# Altium PCB PedalBox.PcbDoc (part 2 of 2)
Units mm, origin at the board's own origin, x right, y up, seen from the top; angles counter-clockwise.
Board outline 89.6 x 44.45 mm, 2 copper layers (Top Layer, Bottom Layer); 149 components, 99 nets, 491 pads, 141 vias.
Unrouted connection lines stored in the file: 1.
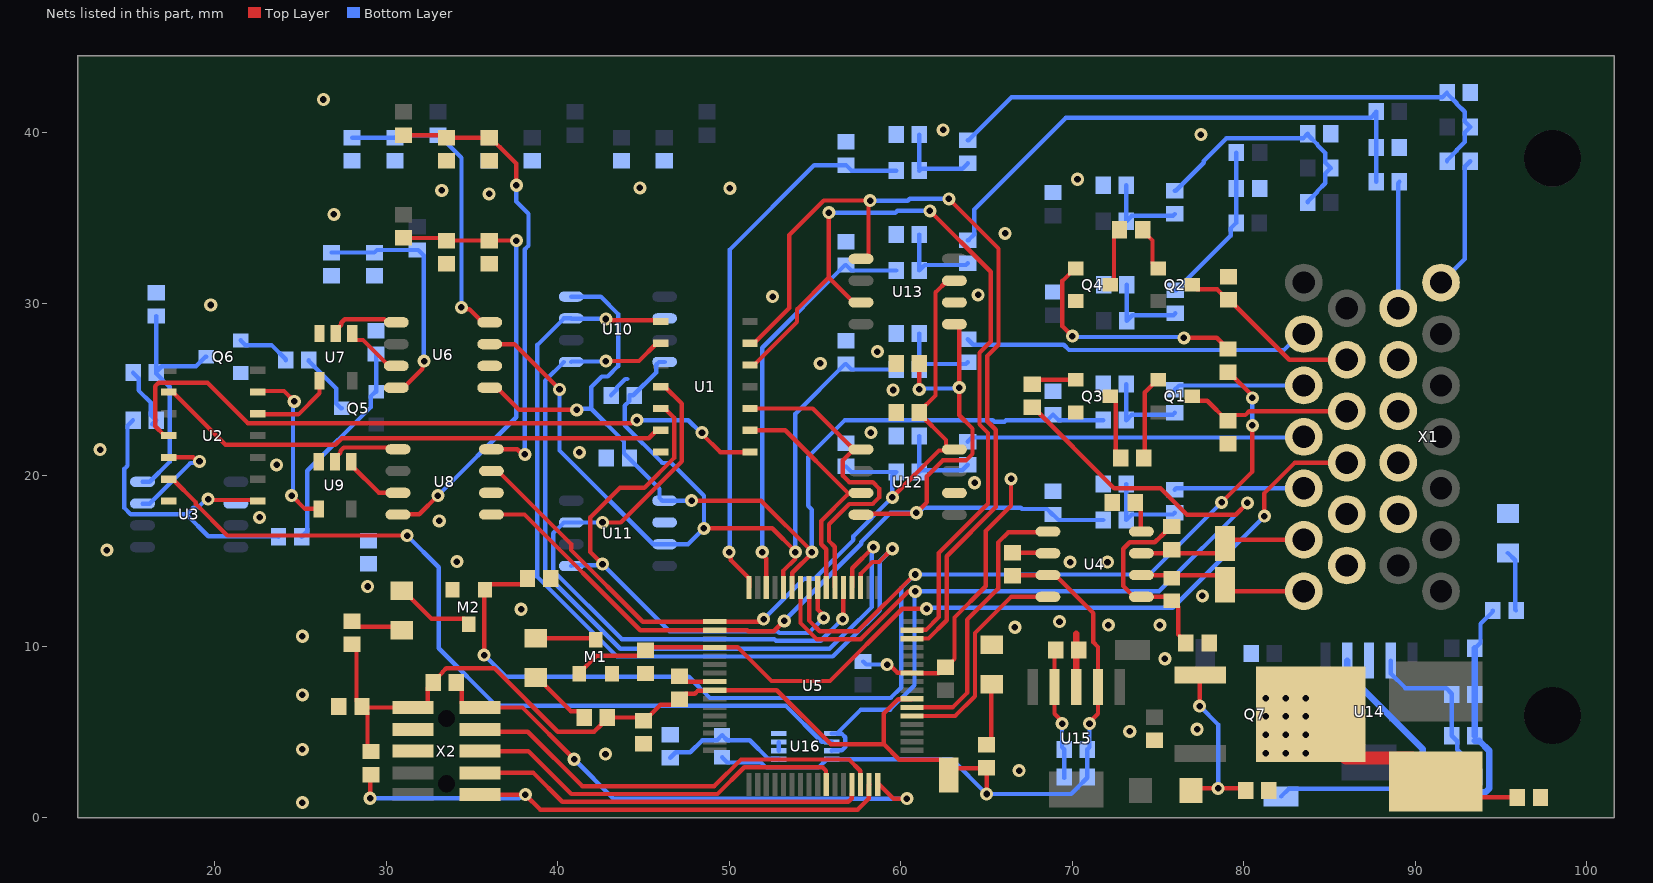
[diagram p2: the nets of this part, all layers, seen from the top]

## Via types
v1: diameter 0.762, hole 0.381, Top Layer to Bottom Layer, 141 vias

## Nets (pads, with @x,y where several pads share a name; then routed paths per layer and width w, separated by ;. In a path a pad name is that pad's centre, name@x,y a point inside that pad or via, vN(x,y) a via of type N, cw(c..) or ccw(c..) an arc to the next point about the centre after c; other vN are vias at no path point) (continued)
AGND: C1.1 C7.1 C8.1 C9.1 C10.1 C11.1 C12.1 C13.1 C14.1 C15.1 C16.1 C17.1 C18.1 C19.1 C20.1 C21.1 C22.1 C23.1 C24.1 C26.1 C27.1 C28.1 C29.1 C30.1 C31.1 C33.1 D4.2 L1.2 Q6.2 R11.1 R40.1 R41.1 R42.1 R43.1 R47.2 R48.2 R49.2 R53.2 R54.2 R55.2 R60.1 R61.1 R66.1 R67.1 R69.1 U1.7 U2.7 U3.2 U5.10 U6.2 U7.3 U8.2 U9.3 U10.2 U11.2 U12.2 U13.2 U14.3 | length 19.2
  Top Layer w0.254: v1(59.2,8.95) 59.317,8.95 59.797,8.47 60.63,8.47 U5.10@60.65,8.45 62.2,8.45 62.55,8.8 62.65,8.8 63.129,9.279 63.129,11.69 64.953,13.515 64.953,16.735 66.425,18.207 v1(66.425,19.772)
  Bottom Layer w0.254: R41.1@43.1,24.647 43.423,24.97 43.423,25.093 43.93,25.6 44.037,25.6 ; C8.1@57.8,9.125 57.975,8.95 v1(59.2,8.95)
  other v1: 13.7,15.625 33.08,17.325 22.6,17.525 64.3,19.55 23.6,20.596 41.25,21.325 13.3,21.478 58.25,22.476 59.55,24.958 55.298,26.507 58.625,27.2 19.755,29.916 52.525,30.405 64.5,30.5 66.075,34.091 26.932,35.2 35.99,36.4 33.225,36.6 44.775,36.74 50.025,36.725 70.3,37.25 77.5,39.85 62.465,40.129 26.325,41.9
BK1_Filtered: C20.2 R32.2 U5.30 | length 24
  Top Layer w0.254: v1(51.917,15.5) 51.917,15.363 52.15,15.13 U5.30@52.15,13.45
  Bottom Layer w0.254: v1(51.917,15.5) 51.917,27.417 56.75,32.25 C20.2@56.8,32.25 57.123,31.927 59.723,31.927 R32.2@59.725,31.925
BK1_Harness: R64.1 X1.19 | length 7.4
  Bottom Layer w0.254: X1.19@89,29.725 89,37.025 R64.1@89.075,37.1
BK2_Filtered: C18.2 R30.2 U5.32 | length 32.1
  Top Layer w0.254: v1(49.987,15.5) 50.084,15.403 50.084,15.041 51.15,13.975 U5.32@51.15,13.45
  Bottom Layer w0.254: v1(49.987,15.5) 50.028,15.541 50.028,33.153 54.95,38.075 C18.2@56.8,38.075 57.123,37.752 59.723,37.752 R30.2@59.725,37.75
BK2_Harness: R65.1 X1.26 | length 7.8
  Bottom Layer w0.254: X1.26@91.5,31.225 92.877,32.602 92.877,37.977 R65.1@93.2,38.3
BPC_1_0.5: U1.4 U5.21 U11.7 | length 37.4
  Top Layer w0.254: v1(42.6,17.235) 43.665,17.235 47.232,20.802 47.232,24.151 46.234,25.148 U1.4@46,25.148 ; v1(56.6,11.6) 56.63,11.63 56.63,13.43 U5.21@56.65,13.45
  Bottom Layer w0.254: v1(42.6,17.235) 40.35,17.235 39.72,16.605 39.72,14.434 43.722,10.432 52.616,10.432 52.716,10.332 55.332,10.332 v1(56.6,11.6)
BPC_1_4.5: U1.1 U5.19 U10.7 | length 51.6
  Top Layer w0.254: v1(42.8,29.1) 42.871,29.029 45.929,29.029 U1.1@46,28.958 ; U5.19@57.65,13.45 57.67,13.47 57.67,14.262 58.34,14.932 58.732,14.932 v1(59.5,15.7)
  Bottom Layer w0.254: v1(42.8,29.1) 42.783,29.117 40.793,29.117 U10.7@40.775,29.135 40.35,29.135 38.805,27.59 38.805,14.055 43.443,9.417 52.336,9.417 ; 52.337,9.417 56.029,9.417 57.043,10.432 57.084,10.432 58.767,12.114 58.767,14.967 v1(59.5,15.7)
BPC_2_0.5: U1.5 U5.24 U11.5 | length 31.4
  Top Layer w0.254: v1(42.6,14.8) 41.889,15.511 41.889,17.53 43.62,19.26 45.044,19.26 46.775,20.991 46.775,23.338 46.234,23.878 U1.5@46,23.878 ; U5.24@55.15,13.45 55.15,12.157 55.5,11.807 v1(55.5,11.67)
  Bottom Layer w0.254: U11.5@40.775,14.695 40.828,14.748 42.548,14.748 v1(42.6,14.8) ; v1@42.548,14.695 42.705,14.695 46.511,10.889 52.805,10.889 52.905,10.789 54.619,10.789 v1(55.5,11.67)
BPC_2_4.5: U1.2 U5.20 U10.5 | length 46.7
  Top Layer w0.254: v1(42.8,26.647) 44.725,26.647 45.765,27.688 U1.2@46,27.688 ; U5.20@57.15,13.45 57.17,13.47 57.17,14.57 v1(58.4,15.8)
  Bottom Layer w0.254: U10.5@40.35,26.595 39.263,25.508 39.263,14.245 43.633,9.874 52.147,9.874 52.526,9.875 ; U10.5@40.775,26.595 40.801,26.621 42.774,26.621 v1(42.8,26.647) ; 52.527,9.874 55.839,9.874 56.854,10.889 56.895,10.889 58.309,12.304 v1@58.309,15.819
BPC_AND_OUT: U1.6 U2.2 | length 30.3
  Top Layer w0.254: U2.2@17.3,24.84 17.535,24.84 20.615,21.76 27.021,21.76 27.404,22.142 45.3,22.142 45.765,22.608 U1.6@46,22.608
BPF_Filtered: C12.2 R24.2 R40.2 U5.27 U6.1 U10.8 U11.1 | length 59.7
  Top Layer w0.254: U6.1@36.025,25.095 36.45,25.095 37.745,23.8 v1(41.1,23.8) ; v1(47.795,18.505) 51.849,18.505 54.813,15.541 54.813,15.441 53.67,14.298 53.67,13.47 U5.27@53.65,13.45
  Bottom Layer w0.254: U10.8@40.775,30.405 42.501,30.405 43.511,29.395 43.511,26.353 42.903,25.745 42.553,25.745 41.945,25.137 41.945,23.863 ; v1(41.1,23.8) 41.163,23.863 41.945,23.863 ; v1(47.795,18.505) U11.1@46.225,18.505 46.087,18.505 45.927,18.665 45.927,19.198 43.852,21.273 43.852,21.956 41.945,23.863 ; v1(54.813,15.5) 54.813,17.981 54.589,18.205 54.589,21.056 56.735,23.202 65.367,23.202 65.455,23.114 66.045,23.114 66.133,23.202 68.552,23.202 C12.2@68.875,23.525 69.198,23.202 71.798,23.202 R24.2@71.8,23.2
BPF_Harness: R23.1 X1.5 | length 7.6
  Bottom Layer w0.254: R23.1@75.975,24.975 76.225,25.225 X1.5@83.5,25.225
BPR_Filtered: C14.2 R26.2 R41.2 U5.28 U6.3 U10.4 U11.3 | length 56.6
  Top Layer w0.254: U6.3@36.025,27.635 37.458,27.635 v1(40.093,25) ; v1(48.517,16.892) 52.497,16.892 53.848,15.541 v1(53.848,15.5) 53.848,15.123 53.15,14.425 U5.28@53.15,13.45
  Bottom Layer w0.254: v1(40.093,25) 40.093,21.432 45.56,15.965 U11.3@46.225,15.965 47.59,15.965 v1(48.517,16.892) 48.517,18.789 46.606,20.7 46.094,20.7 43.889,22.905 43.889,24.036 44.172,24.319 44.172,24.647 44.4,24.647 45.734,25.981 45.734,26.435 45.894,26.595 U10.4@46.225,26.595 ; v1(53.848,15.5) 53.848,23.573 56.75,26.475 C14.2@56.8,26.475 57.123,26.152 59.723,26.152 R26.2@59.725,26.15
BPR_Harness: R25.1 X1.6 | length 20.3
  Bottom Layer w0.254: R25.1@63.9,27.925 64.223,27.602 69.492,27.602 69.805,27.289 82.342,27.289 83.278,28.225 X1.6@83.5,28.225
"Brake Front REF": C26.2 R44.2 R47.1 U6.8 | length 13.8
  Top Layer w0.254: U6.8@30.955,25.05 32.103,26.198 32.103,26.55 v1(32.2,26.647)
  Bottom Layer w0.254: C26.2@26.8,32.975 R47.1@29.3,32.975 29.45,33.125 31.85,33.125 32.173,32.802 32.173,26.674 v1(32.2,26.647)
"Brake Rear REF": C28.2 R46.2 R49.1 U6.4 | length 17.7
  Top Layer w0.254: v1(34.375,29.775) 34.472,29.678 34.827,29.678 35.6,28.905 U6.4@36.025,28.905
  Bottom Layer w0.254: C28.2@28,39.675 R49.1@30.5,39.675 30.65,39.825 33.05,39.825 34.375,38.5 v1(34.375,29.775)
"Brakelight 5V": M2.1 R4.1 R20.2 U5.25 | length 77.5
  Top Layer w0.254: v1(35.7,9.5) 35.7,13.3 36.023,13.623 37.902,13.623 38.225,13.946 R20.2@38.225,13.968 ; U5.25@54.65,13.45 54.65,11.514 55.275,10.889 57.477,10.889 60.788,14.2 v1(60.84,14.2) v1@60.875,14.2 ; v1(78.7,18.4) 80.5,20.2 v1(80.5,22.9) ; R4.1@79.075,26 79.125,26 80.5,24.625 v1(80.5,24.5)
  Bottom Layer w0.254: v1(35.7,9.5) 36.968,8.232 47.634,8.232 48.872,6.995 59.401,6.995 60.032,7.626 60.032,13.415 60.817,14.2 v1(60.84,14.2) 74.5,14.2 v1(78.7,18.4) ; v1(80.5,22.9) v1(80.5,24.5)
"Brakelight 12V": Q2.3 R6.2 X1.12 | length 10.7
  Top Layer w0.254: Q2.3@77,31.1 77.273,30.827 78.448,30.827 79.05,30.225 79.15,30.225 82.65,26.725 85.803,26.725 X1.12@85.873,26.795
"BSPD 5V": R3.1 U5.26 U16.5 U16.7 | length 60.7
  Top Layer w0.254: U5.26@54.15,13.45 54.15,11.368 55.086,10.432 57.667,10.432 60.452,13.217 v1(60.84,13.217) ; R3.1@67.664,23.95 67.714,23.95 72.433,19.23 75.139,19.23 76.681,17.689 79.524,17.689 v1(80.209,18.374)
  Bottom Layer w0.254: U16.7@55.975,3.925 55.995,3.945 56.562,3.945 56.755,4.138 56.755,4.712 56.562,4.905 U16.5@56.275,4.905 ; U16.5@55.975,4.925 56.275,4.925 57.669,6.319 59.372,6.319 60.792,7.739 60.792,13.169 v1(60.84,13.217) 75.052,13.217 v1(80.209,18.374)
"BSPD 12V": Q1.3 R5.2 X1.11 | length 9.7
  Top Layer w0.254: Q1.3@77,24.6 77.273,24.327 77.873,24.327 79.025,23.175 R5.2@79.075,23.175 79.398,23.498 80.092,23.498 80.319,23.725 85.809,23.725 X1.11@85.873,23.789
BSPD_NoLatch: U2.6 U16.6 | length 47.9
  Top Layer w0.254: U2.6@17.3,19.76 17.535,19.76 18.889,18.406 18.889,18.305 20.724,16.47 v1(31.208,16.47)
  Bottom Layer w0.254: v1(31.208,16.47) 33.05,14.628 33.05,9.9 36.412,6.538 53.295,6.538 55.388,4.445 55.955,4.445 U16.6@55.975,4.425
CAN_N: R12.2 TP1.1 U4.6 X1.1 | length 10.6
  Top Layer w0.254: U4.6@74.025,14.165 78.582,14.165 78.9,14.483 78.9,13.673 79.348,13.225 X1.1@83.5,13.225
CAN_P: R13.2 TP2.1 U4.7 X1.2 | length 10.5
  Top Layer w0.254: U4.7@74.025,15.435 78.582,15.435 78.9,15.118 78.9,15.777 79.348,16.225 X1.2@83.5,16.225
CT1_Filtered: C24.2 R36.2 R42.2 U5.34 U8.1 U12.8 U13.1 | length 62.3
  Top Layer w0.254: U8.1@36.23,17.695 38.053,17.695 44.798,10.95 U5.34@49.15,10.95 51.034,10.95 51.095,10.889 52.589,10.889 v1(53.2,11.5) ; U12.8@57.675,17.684 57.733,17.742 60.842,17.742 v1(60.9,17.8) 61.518,18.418 61.518,19.933 62.439,20.854 63.801,20.854 64.18,21.233 64.18,22.708 63.403,23.485 v1(63.403,25.097) 63.403,28.635 63.243,28.795 U13.1@63.125,28.795 ; v1(61.072,25) 61.072,26.297 R42.2@61.075,26.3
  Bottom Layer w0.254: v1(53.2,11.5) 57.689,15.989 57.689,16.095 59.394,17.8 60.84,17.8 60.9,17.86 61.097,17.86 61.324,18.086 66.995,18.086 67.058,18.023 68.52,18.023 C24.2@68.859,17.684 ; v1(61.072,25) 61.121,25.049 63.354,25.049 v1(63.403,25.097) ; C24.2@68.875,17.7 69.198,17.377 71.798,17.377 R36.2@71.8,17.375
CT1_Harness: R35.1 X1.3 | length 7.6
  Bottom Layer w0.254: R35.1@75.975,19.15 76.05,19.225 X1.3@83.5,19.225
CT2_Filtered: C22.2 R34.2 R43.2 U5.33 U8.3 U12.4 U13.3 | length 50.5
  Top Layer w0.254: U8.3@36.622,20.122 40.769,15.975 40.769,15.626 44.944,11.45 U5.33@49.15,11.45 51.713,11.45 51.863,11.6 v1(52,11.6) ; v1(59.5,18.7) 62.228,21.428 62.727,21.428 62.773,21.473 62.634,21.613 62.634,22.041 61.075,23.6 R43.2@61.075,23.65 61.075,23.7 62.016,24.641 62.016,30.651 62.7,31.335 U13.3@63.125,31.335
  Bottom Layer w0.254: v1(52,11.6) 54.357,13.957 54.971,13.957 57.231,16.217 57.231,16.431 59.402,18.602 59.402,18.796 59.5,18.894 59.5,19.95 R34.2@59.725,20.175 59.684,20.175 59.682,20.177 57.123,20.177 C22.2@56.8,20.5
CT2_Harness: R33.1 X1.4 | length 19.7
  Bottom Layer w0.254: R33.1@63.9,21.95 64.139,22.189 83.464,22.189 X1.4@83.5,22.225
CTC_1_0.5: U1.12 U5.15 U13.7 | length 48
  Top Layer w0.254: U1.12@51.2,26.418 51.434,26.418 53.946,28.929 53.946,29.661 55.8,31.515 ; v1(55.8,35.3) 55.8,31.515 ; U13.7@57.675,30.065 57.25,30.065 55.8,31.515 ; U5.15@60.65,10.95 60.67,10.97 61.462,10.97 62.214,11.722 62.214,15.457 65.08,18.323 65.08,22.454 64.582,22.953 64.582,27.131 65.24,27.789 65.24,31.86 v1(61.697,35.403)
  Bottom Layer w0.254: v1(55.8,35.3) 57.905,35.3 57.917,35.289 59.681,35.289 59.795,35.403 v1(61.697,35.403)
CTC_1_4.5: U1.9 U5.23 U12.7 | length 14.1
  Top Layer w0.254: U1.9@51.2,22.608 53.262,22.608 56.916,18.954 U12.7@57.543,18.954 ; U5.23@55.65,13.45 55.65,15.669 55.352,15.967 55.352,17.323 56.916,18.888
CTC_2_0.5: U1.13 U5.14 U13.5 | length 51.3
  Top Layer w0.254: U1.13@51.2,27.688 51.434,27.688 53.489,29.742 53.489,33.995 55.505,36.011 58.2,36.011 v1(58.211,36) 58.114,35.903 58.114,32.765 57.954,32.605 U13.5@57.675,32.605 ; U5.14@60.65,10.45 60.67,10.47 61.608,10.47 62.671,11.533 62.671,15.267 65.537,18.133 65.537,22.644 65.039,23.142 65.039,26.941 65.697,27.599 65.697,33.203 v1(62.8,36.1)
  Bottom Layer w0.254: v1(58.211,36) 60.4,36 60.514,36.114 62.786,36.114 v1(62.8,36.1)
CTC_2_4.5: U1.10 U5.22 U12.5 | length 19.6
  Top Layer w0.254: U1.10@51.2,23.878 54.866,23.878 U12.5@57.25,21.494 ; U5.22@56.15,13.45 56.15,15.815 55.809,16.156 55.809,17.134 56.989,18.314 58.351,18.314 58.73,18.693 58.73,19.215 58.356,19.589 56.994,19.589 56.62,19.963 56.62,20.864 U12.5@57.25,21.494 ; U12.5@57.675,21.494 U12.5@57.25,21.494
CTC_AND_OUT: U1.8 U2.4 | length 40
  Top Layer w0.254: U2.4@17.3,22.3 17.066,22.3 16.525,22.84 16.525,25.187 16.719,25.38 19.568,25.38 21.919,23.03 44.292,23.03 44.463,23.2 v1(44.6,23.2) ; v1(48.402,22.476) 48.402,22.397 49.462,21.338 U1.8@51.2,21.338
  Bottom Layer w0.254: v1(44.6,23.2) 47.6,23.2 48.324,22.476 v1(48.402,22.476)
"Current/Throttle 1 REF": C29.2 R50.2 R53.1 U8.8 | length 26.2
  Top Layer w0.254: U8.8@30.675,17.695 30.698,17.718 31.918,17.718 v1(33,18.8) ; R50.2@31,33.825 33.35,33.825 R53.1@33.5,33.675 v1(37.575,33.675)
  Bottom Layer w0.254: v1(33,18.8) 37.575,23.375 v1(37.575,33.675)
"Current/Throttle 2 REF": C31.2 R52.2 R55.1 U8.4 | length 26.7
  Top Layer w0.254: R52.2@31,39.825 33.35,39.825 R55.1@33.5,39.675 C31.2@36,39.675 36.05,39.675 36.62,39.105 36.637,39.105 37.575,38.167 v1(37.575,36.9) ; U8.4@36.125,21.505 37.633,21.505 37.938,21.2 v1(38.075,21.2)
  Bottom Layer w0.254: v1(37.575,36.9) 37.575,35.95 38.286,35.239 38.286,33.38 38.075,33.169 v1(38.075,21.2)
DGND: C2.1 C3.2 C4.1 C5.1 C6.1 C25.1 C35.1 C36.2 D3.2 L1.1 M1.2 M2.2 Q3.2 Q4.2 R5.1 R6.1 R14.2 R19.1 R20.1 R39.1 R71.1 U4.2 U5.40 U15.3 U16.4 X1.8 X1.9 X1.15 X1.16 X1.17 X1.18 X2.3 X2.5 | length 6.9
  Top Layer w0.254: C4.1@47.1,8.275 47.423,7.952 49.148,7.952 U5.40@49.15,7.95 ; 67,15.475 68.535,15.475 U4.2@68.575,15.435
  Top Layer w0.381: U15.3@70.225,7.625 70.225,9.8 70.225,10.749
  other v1: 25.1,0.9 66.9,2.762 42.775,3.725 25.1,4 73.349,5.05 77.273,5.175 25.1,7.179 75.4,9.287 25.1,10.6 66.645,11.125 72.097,11.248 75.101,11.249 69.25,11.45 37.859,12.175 77.578,12.95 28.9,13.5 69.875,14.925 72.05,14.925 34.114,14.95
JTAG_RST: R16.1 U5.63 X2.10 | length 34.7
  Top Layer w0.254: v1(29.05,1.15) 29.05,2.479 R16.1@29.1,2.529 ; X2.10@35.45,1.36 v1(38.1,1.36) 38.972,0.488 57.48,0.488 58.13,1.138 58.13,1.93 U5.63@58.15,1.95
  Bottom Layer w0.254: v1(29.05,1.15) 37.753,1.15 37.963,1.36 v1(38.1,1.36)
JTAG_TCLK: U5.62 X2.4 | length 25.3
  Top Layer w0.254: X2.4@35.45,5.17 35.59,5.03 38.245,5.03 41.416,1.859 49.121,1.859 50.674,3.412 56.98,3.412 57.63,2.762 57.63,1.97 U5.62@57.65,1.95
JTAG_TDI: U5.61 X2.8 | length 22.7
  Top Layer w0.254: X2.8@35.45,2.63 38.57,2.63 40.255,0.945 56.937,0.945 57.13,1.138 U5.61@57.13,1.402
JTAG_TDO: U5.58 X2.6 | length 22.8
  Top Layer w0.254: X2.6@35.45,3.9 38.275,3.9 40.773,1.402 49.31,1.402 50.863,2.955 55.437,2.955 55.63,2.762 55.63,1.97 U5.58@55.65,1.95
JTAG_TMS: R15.1 U5.64 X2.2 | length 31.7
  Top Layer w0.254: R15.1@34.075,7.9 34.398,7.577 34.398,6.693 34.651,6.44 X2.2@35.45,6.44 37.935,6.44 v1(40.95,3.425) ; U5.64@58.65,1.95 58.65,2.002 58.673,2.025 59.573,1.125 v1(60.35,1.125)
  Bottom Layer w0.254: v1(40.95,3.425) 43.25,1.125 v1(60.35,1.125)
LDO_ADJ_5V_LDO_Analog: C32.1 R68.1 R69.2 U14.4 | length 10.2
  Bottom Layer w0.254: U14.4@88.57,9.175 88.57,8.425 89.422,7.573 91.802,7.573 92.125,7.25 C32.1@92.125,4.8 92.448,4.477 92.448,3.985 93.152,3.281 93.152,2.723 R69.2@93.475,2.4
LDO_ADJ_5V_LDO_Digital: C34.1 R70.1 R71.2 U15.4 | length 7.7
  Top Layer w0.254: R71.2@69.025,9.8 68.955,9.73 U15.4@68.955,7.625 68.955,6.082 69.4,5.637 v1(69.4,5.5)
  Bottom Layer w0.254: v1(69.4,5.5) 69.4,4.125 C34.1@69.525,4 R70.1@69.525,2.33
LDO_OUT_5V_LDO_Analog: C32.2 L2.1 R38.1 R68.2 TP3.1 U14.2 | length 32.7
  Bottom Layer w0.254: TP3.1@82.175,1.25 82.623,1.698 89.573,1.698 90.447,2.572 ; L2.1@93.475,9.9 93.798,10.223 93.798,11.323 94.525,12.05 R38.1@94.525,12.1
  Bottom Layer w0.381: U14.2@86.03,9.175 86.03,8.425 90.447,4.008 90.447,2.572 91.512,1.506 94.088,1.506 94.319,1.737 94.319,3.906 93.725,4.5 C32.2@93.475,4.5 ; C32.2@93.475,4.8 L2.1@93.475,9.9
LDO_OUT_5V_LDO_Digital: C2.2 C4.2 C5.2 C6.2 C34.2 R15.2 R16.2 R17.2 R18.2 R37.1 R70.2 R72.2 TP5.1 U4.3 U5.7 U5.41 U15.2 U16.8 X2.1 | length 93.1
  Top Layer w0.254: R18.2@28,10.125 28.252,9.873 28.252,6.823 28.898,6.177 28.898,4.081 R16.2@29.1,3.879 ; C6.2@28.635,6.44 32.149,6.44 32.402,6.693 32.402,7.577 R15.2@32.725,7.9 32.725,7.95 33.295,8.52 33.295,8.537 33.488,8.73 36.296,8.73 39.996,5.03 42.112,5.03 42.552,5.47 42.552,5.537 R17.2@42.875,5.86 45.235,5.86 45.977,6.602 46.777,6.602 47.423,7.248 47.981,7.248 48.163,7.43 49.13,7.43 U5.41@49.15,7.45 52.768,7.45 55.91,4.308 59,4.308 ; U5.7@60.65,6.95 60.63,6.93 59.838,6.93 59,6.092 59,4.308 ; v1(65,1.4) R37.1@65,2.925 64.973,2.898 62.7,2.898 62.7,3.05 62.352,3.398 59.91,3.398 59,4.308 ; C2.2@66.5,14.125 66.54,14.165 69,14.165 71.226,11.939 71.226,10.244 71.495,9.976 U15.2@71.495,7.625 71.495,6.083 71,5.588 v1(71,5.5)
  Bottom Layer w0.254: R72.2@49.575,3.537 49.873,3.239 51.847,3.239 52.142,2.945 55.195,2.945 55.675,3.425 62.975,3.425 v1(65,1.4) 69.942,1.4 70.305,1.763 70.305,1.78 70.875,2.35 C34.2@70.875,4 71,4.125 v1(71,5.5)
LED1: M1.1 R19.2 U5.36 X1.10 | length 52.3
  Top Layer w0.254: M1.1@41.25,8.4 41.25,8.45 42.252,9.452 44.777,9.452 45.275,9.95 U5.36@49.15,9.95 50.497,9.95 52.458,7.989 55.871,7.989 60.082,12.201 v1(61.503,12.201) ; v1(81.2,17.6) 81.2,18.948 82.977,20.725 X1.10@86,20.725
  Bottom Layer w0.254: v1(61.503,12.201) 61.559,12.256 75.856,12.256 v1(81.2,17.6)
NetC1_2: C1.2 Q6.3 R8.2 U3.8 | length 14.2
  Bottom Layer w0.254: U3.8@15.775,19.605 16.2,19.605 17.355,20.76 17.355,25.14 16.575,25.92 C1.2@16.575,29.275 ; R8.2@16.575,26.02 16.898,26.343 18.893,26.343 19.45,26.9 Q6.3@19.5,26.9
NetC9_2: C9.2 R21.2 R22.1 | length 5.1
  Bottom Layer w0.254: C9.2@73.15,36.9 R22.1@73.15,34.8 73.473,35.123 75.873,35.123 R21.2@75.975,35.225
NetC11_2: C11.2 R23.2 R24.1 | length 5.1
  Bottom Layer w0.254: C11.2@73.15,25.3 R24.1@73.15,23.2 73.473,23.523 75.873,23.523 R23.2@75.975,23.625
NetC13_2: C13.2 R25.2 R26.1 | length 5.1
  Bottom Layer w0.254: C13.2@61.075,28.25 R26.1@61.075,26.15 61.398,26.473 63.798,26.473 R25.2@63.9,26.575
NetC15_2: C15.2 R27.2 R28.1 | length 5.1
  Bottom Layer w0.254: C15.2@73.175,31.1 R28.1@73.175,29 73.498,29.323 75.898,29.323 R27.2@76,29.425
NetC17_2: C17.2 R29.2 R30.1 | length 5
  Bottom Layer w0.254: R30.1@61.075,37.75 61.177,37.852 63.577,37.852 R29.2@63.9,38.175 ; R30.1@61.075,37.852 C17.2@61.075,39.85
NetC19_2: C19.2 R31.2 R32.1 | length 5.1
  Bottom Layer w0.254: C19.2@61.075,34.025 R32.1@61.075,31.925 61.398,32.248 63.798,32.248 R31.2@63.9,32.35
NetC21_2: C21.2 R33.2 R34.1 | length 5
  Bottom Layer w0.254: R34.1@61.075,20.175 61.177,20.277 63.577,20.277 R33.2@63.9,20.6 ; R34.1@61.075,20.277 C21.2@61.075,22.275
NetC23_2: C23.2 R35.2 R36.1 | length 5.1
  Bottom Layer w0.254: C23.2@73.15,19.475 R36.1@73.15,17.375 73.473,17.698 75.873,17.698 R35.2@75.975,17.8
NetC36_1: C36.1 R72.1 U16.1 | length 7.5
  Bottom Layer w0.254: C36.1@46.55,3.512 46.873,3.835 47.723,3.835 48.427,4.539 49.277,4.539 R72.1@49.575,4.837 49.873,4.539 51.194,4.539 52.288,3.445 52.855,3.445 U16.1@52.875,3.425
NetD1_1: D1.1 R17.1 | length 3.8
  Top Layer w0.254: D1.1@38.7,8.186 38.8,8.186 40.753,6.233 41.202,6.233 41.525,5.91 R17.1@41.525,5.86
NetD1_2: D1.2 M1.3 | length 3.5
  Top Layer w0.254: D1.2@38.7,10.486 42.114,10.486 M1.3@42.2,10.4
NetD2_1: D2.1 R18.1 | length 3.1
  Top Layer w0.254: R18.1@28,11.475 28.323,11.152 30.698,11.152 D2.1@30.9,10.95
NetD2_2: D2.2 M2.3 | length 4.7
  Top Layer w0.254: D2.2@30.9,13.25 31,13.25 32.627,11.623 34.527,11.623 34.8,11.35 M2.3@34.8,11.3
NetD3_1: D3.1 R37.2 | length 3.9
  Top Layer w0.254: R37.2@65,4.275 65.277,4.552 65.277,7.477 D3.1@65.7,7.9
NetD4_1: D4.1 R38.2 | length 3.5
  Bottom Layer w0.254: D4.1@95.4,15.45 95.823,15.027 95.823,12.152 R38.2@95.875,12.1
NetD5_1: D5.1 Q7.1 R39.2 | length 9.5
  Top Layer w0.254: D5.1@77.15,1.725 v1(78.5,1.725) 79.777,1.725 79.9,1.602 R39.2@79.9,1.45 ; v1(77.425,6.525) Q7.1@77.425,7.865
  Bottom Layer w0.254: v1(77.425,6.525) 78.5,5.45 v1(78.5,1.725)
NetQ1_1: Q1.1 R1.2 | length 4.9
  Top Layer w0.254: R1.2@74.175,21 74.22,21.045 74.22,24.82 74.95,25.55 Q1.1@75,25.55
NetQ2_1: Q2.1 R2.2 | length 2.7
  Top Layer w0.254: R2.2@74.1,34.3 74.1,34.25 74.677,33.673 74.677,32.323 74.95,32.05 Q2.1@75,32.05
NetQ3_1: Q3.1 R3.2 | length 2.6
  Top Layer w0.254: R3.2@67.664,25.3 67.914,25.55 Q3.1@70.2,25.55
NetQ3_3: Q3.3 R1.1 | length 3.9
  Top Layer w0.254: Q3.3@72.2,24.6 72.25,24.6 72.523,24.327 72.523,21.302 R1.1@72.825,21
NetQ4_1: Q4.1 R4.2 | length 13.9
  Top Layer w0.254: v1(70,28.1) 69.42,28.68 69.42,31.32 70.15,32.05 Q4.1@70.2,32.05 ; v1(76.5,28) 78.425,28 R4.2@79.075,27.35
  Bottom Layer w0.254: v1(70,28.1) 70.05,28.05 76.45,28.05 v1(76.5,28)
NetQ4_3: Q4.3 R2.1 | length 3.4
  Top Layer w0.254: Q4.3@72.2,31.1 72.427,31.327 72.427,33.977 R2.1@72.75,34.3
NetQ5_1: Q5.1 R9.2 R11.2 | length 12.5
  Bottom Layer w0.254: R9.2@25.058,16.4 25.381,16.723 25.381,20.248 29.077,23.944 29.077,24.577 29.35,24.85 Q5.1@29.4,24.85 R11.2@29.4,27.057
NetQ5_3: Q5.3 R10.1 | length 3.6
  Bottom Layer w0.254: R10.1@25.475,26.7 25.475,26.65 27.077,25.048 27.077,24.173 27.35,23.9 Q5.3@27.4,23.9
NetQ6_1: Q6.1 R10.2 | length 3.1
  Bottom Layer w0.254: Q6.1@21.5,27.85 21.773,27.577 23.298,27.577 24.125,26.75 R10.2@24.125,26.7
NetR7_2: R7.2 R8.1 | length 3.7
  Bottom Layer w0.254: R8.1@15.225,25.97 15.548,25.647 15.548,24.934 16.252,24.23 16.252,23.518 R7.2@16.575,23.195 R7.2@16.35,22.97
NetR21_1: R21.1 R57.1 R59.2 R61.2 | length 14.3
  Bottom Layer w0.254: R21.1@75.975,36.575 76.025,36.575 77.664,38.214 77.664,38.314 78.98,39.63 83.455,39.63 R61.2@83.725,39.9 83.725,39.85 84.295,39.28 84.295,39.238 84.752,38.781 84.752,38.223 R57.1@85.075,37.9 84.752,37.577 84.752,37.019 84.295,36.562 84.295,36.52 83.725,35.95 R59.2@83.725,35.9
NetR27_1: R27.1 R56.1 R58.2 R60.2 | length 9.5
  Bottom Layer w0.254: R27.1@76,30.775 76.05,30.775 79.227,33.952 79.227,34.377 R58.2@79.55,34.7 79.55,36.683 R60.2@79.567,36.7 R56.1@79.567,38.8
NetR29_1: R29.1 R63.1 R65.2 R67.2 | length 34.2
  Bottom Layer w0.254: R29.1@63.9,39.525 63.95,39.525 66.455,42.03 91.58,42.03 R67.2@91.85,42.3 91.85,42.25 92.42,41.68 92.42,41.638 92.877,41.181 92.877,40.623 R63.1@93.2,40.3 92.877,39.977 92.877,39.419 92.42,38.962 92.42,38.92 91.85,38.35 R65.2@91.85,38.3
NetR31_1: R31.1 R62.1 R64.2 R66.2 | length 31.9
  Bottom Layer w0.254: R31.1@63.9,33.7 63.95,33.7 64.273,34.023 64.273,35.484 69.616,40.827 87.402,40.827 87.725,41.15 R62.1@87.725,41.2 R64.2@87.725,37.1
NetU2_12: U2.12 U7.4 | length 4.9
  Top Layer w0.254: U2.12@22.5,23.57 22.533,23.537 24.868,23.537 26.1,24.769 U7.4@26.1,25.5
NetU2_13: U2.13 U9.4 | length 9.9
  Top Layer w0.254: U2.13@22.5,24.84 22.559,24.899 24.026,24.899 v1(24.625,24.3) ; v1(24.475,18.8) 25.25,18.025 U9.4@26.05,18.025
  Bottom Layer w0.254: v1(24.475,18.8) 24.55,18.875 24.55,24.225 v1(24.625,24.3)
NetU6_5: U6.5 U7.2 | length 4.1
  Top Layer w0.254: U7.2@27.05,28.25 27.05,28.45 27.37,28.77 27.37,28.887 27.563,29.08 29.881,29.08 30.056,28.905 U6.5@30.575,28.905
NetU6_7: U6.7 U7.1 | length 3.5
  Top Layer w0.254: U7.1@28,28.25 28,28.05 28.173,27.877 28.638,27.877 30.15,26.365 U6.7@30.575,26.365
NetU8_5: U8.5 U9.2 | length 4.2
  Top Layer w0.254: U9.2@27,20.775 27,20.975 27.32,21.295 27.32,21.412 27.513,21.605 30.056,21.605 30.156,21.505 U8.5@30.675,21.505
NetU8_7: U8.7 U9.1 | length 3.6
  Top Layer w0.254: U9.1@27.95,20.775 27.95,20.575 29.56,18.965 U8.7@30.675,18.965
NetU16_2: U16.2 U16.3 | length 0.5
  Bottom Layer w0.254: U16.2@52.875,3.925 U16.3@52.875,4.425
Plaus_OUT: R7.1 R9.1 U2.8 | length 19.6
  Top Layer w0.254: v1(19.6,18.6) 19.655,18.545 22.445,18.545 U2.8@22.5,18.49
  Bottom Layer w0.254: R7.1@15.225,23.195 14.902,22.872 14.902,20.539 14.72,20.357 14.72,18.074 15.089,17.705 18.346,17.705 ; v1(19.6,18.6) 19.515,18.6 19.019,18.104 18.745,18.104 18.346,17.705 ; R9.1@23.708,16.4 23.673,16.435 19.616,16.435 18.346,17.705
RVPOVP_In: C25.2 F1.2 Q7.3 | length 13.9
  Top Layer w0.254: F1.2@91.2,2.125 92.125,1.2 C25.2@95.95,1.2
  Top Layer w0.762: Q7.3@83.875,5.575 85.956,3.494 89.831,3.494 F1.2@91.2,2.125
  other v1: 81.275,3.771 82.442,3.771 83.608,3.771 81.275,4.846 82.442,4.846 83.608,4.846 81.275,5.921 82.442,5.921 83.608,5.921 81.275,6.996 82.442,6.996 83.608,6.996
RX_CAN: U4.4 U5.5 | length 13
  Top Layer w0.254: U5.5@60.65,5.95 63.164,5.95 64.32,7.106 64.32,10.787 66.428,12.895 U4.4@68.575,12.895
SPLIT: C3.1 R12.1 R13.1 U4.5 | length 11.6
  Top Layer w0.254: R13.1@75.8,17 75.75,17 75.18,16.43 75.163,16.43 74.808,16.075 73.349,16.075 72.97,15.696 72.97,13.525 73.6,12.895 75.555,12.895 75.8,12.65 75.85,12.65 76.173,12.327 76.173,10.702 76.625,10.25 C3.1@76.625,10.2
STBY: R14.1 U4.8 | length 1.4
  Top Layer w0.254: R14.1@73.998,18.077 73.998,16.732 U4.8@74.025,16.705
Timer_OUT: U2.5 U3.7 | length 6.2
  Top Layer w0.254: U2.5@17.3,21.03 18.733,21.03 18.963,20.8 v1(19.1,20.8)
  Bottom Layer w0.254: U3.7@15.775,18.335 16.2,18.335 18.568,20.703 19.003,20.703 v1(19.1,20.8)
TX_CAN: U4.1 U5.6 | length 16.2
  Top Layer w0.254: U5.6@60.65,6.45 63.017,6.45 63.863,7.296 63.863,11.556 65.67,13.363 65.67,16.062 66.272,16.664 68.534,16.664 U4.1@68.575,16.705
pads on no net: U1.3 U1.11 U2.3 U2.11 U3.3 U3.4 U3.5 U5.1 U5.2 U5.3 U5.4 U5.11 U5.12 U5.13 U5.16 U5.17 U5.18 U5.35 U5.37 U5.38 U5.39 U5.42 U5.43 U5.44 U5.45 U5.46 U5.47 U5.48 U5.49 U5.50 U5.51 U5.52 U5.53 U5.54 U5.55 U5.56 U5.57 U5.59 U5.60 U14. U15. X1.CH X1.RH X2.7 X2.9 X2.MH1 X2.MH2

## Polygon pours and split planes (outlines as drawn)
DGND on Top Layer "Top Layer-No Net" (solid, pour order 0): 12,12 26.475,12 30.571,16.096 62.096,16.096 65.805,19.805 65.805,32.605 69.4,36.2 102.6,36.2 102.6,20.1 102.6,-1 13,-1 12,0
AGND on Top Layer "Top Layer-No Net 1" (solid, pour order 2): 0,12 26.475,12 30.129,15.654 103.6,15.654 103.6,44.9 100.9,47.6 13.7,47.6 -1.4,32.5 -1.4,12.9
AGND on Bottom Layer "Bottom Layer-No Net" (solid, pour order 15): 74.1,1.684 74.1,11.8 -0.6,11.8 -1.4,11 -1.4,49 99.5,49 108.5,40 108.5,-3.2 78.984,-3.2
DGND on Bottom Layer "Bottom Layer-No Net 1" (solid, pour order 12): 78.1,-0.6 78.1,15.382 15.082,15.382 5.2,5.5 5.2,-1.8 76.9,-1.8
RVPOVP_In on Bottom Layer "Bottom Layer-No Net 2" (solid, pour order 10): 84.125,7.45 84.125,3.3 80.8,3.3 80.8,7.449
RVPOVP_In on Bottom Solder "Bottom Layer-No Net 2" (solid, pour order 17): 84.125,7.45 84.125,3.3 80.8,3.3 80.8,7.449

## Keep-outs
Top Layer:
  rectangle: 12,32.45 24,44.45
  rectangle: 12,0 24,12

## Silkscreen, mask and mechanical layers (free items; w line width, h text height)
Top Overlay:
  lines w0.254: 28.825,37.3 34.725,37.3 34.725,43.275 28.825,43.275 28.825,37.3 ; 29.525,31.275 29.525,37.25 34.675,37.25 34.675,31.275 29.525,31.275
  text "Design and Layout by: / Kevin Jung / Marc Wong" at 62.648,36.843 h1
  text "CTC 2 VRef" at 28.638,36.4 h1.25 r90
  text "CTC 1 VRef" at 29.3,29.9 h1.25 r90
  text "a" at 39.517,16.675 h25
Bottom Overlay:
  lines w0.254: 13.75,21.679 13.75,33.05 18.275,33.05 18.275,21.679 13.75,21.679 ; 28.083,30.475 28.083,36.363 33.15,36.363 33.15,30.475 28.083,30.475 ; 29.275,37.3 29.275,43.436 34.425,43.436 34.425,37.3 29.275,37.3 ; 44.925,2.15 51.35,2.15 51.35,7.388 44.925,7.388 44.925,2.15 ; 78.564,33.725 78.564,35.675 81.875,35.675 81.875,33.725 78.564,33.725 ; 82.739,34.925 86.05,34.925 86.05,36.875 82.739,36.875 82.739,34.925 ; 86.739,36.125 86.739,38.075 90.05,38.075 90.05,36.125 86.739,36.125 ; 90.864,37.325 90.864,39.275 94.175,39.275 94.175,37.325 90.864,37.325
  text "BPC Rear / VRef" at 41.175,41.825 h1.25
  text "Timer" at 13.55,29.675 h1.25 r90
  text "BPC Front VRef" at 33.55,29.525 h1.25 r270
  text "Small but Mighty" at 98.05,11.249 h1.5 r270
  text "Pedalbox" at 73.825,8.975 h1.5
  text "Latch" at 52.075,7.775 h1.25
  text "REV 1.0 (11/2019)" at 70.475,7.275 h0.5
Mechanical 15:
  lines w0.1: 101.6,32.45 101.601,32.45 ; 12,44.45 24,44.45 ; 12,44.45 12,44.45 ; 12,44.45 12,12 12,11.999 12,0 101.601,0 101.601,44.45 24,44.45 ; 24,44.45 24,44.45 ; 89.6,44.45 89.601,44.45
  lines w0.254: 77.6,12 77.601,12

## Text inside footprints (layer, text, board x,y; h text height)
D1: Top Overlay "*" at 38.192,10.86 h1.52 r90
D2: Top Overlay "*" at 30.392,13.624 h1.52 r90
D3: Top Overlay "*" at 64.792,10.474 h1.52 r90
D4: Bottom Overlay "*" at 95.908,18.124 h1.52 r270
X1: Top Overlay "SUPER SEAL 26POS" at 81.3,35.5 h1.25